# Altium PCB PCB_2021-02-27.pcbdoc (part 2 of 2)
Units mil, origin at the board's own origin, x right, y up, seen from the top; angles counter-clockwise.
Board outline 2908.11 x 4260.21 mil, 2 copper layers (Top Layer, Bottom Layer); 56 components, 104 nets, 335 pads, 150 vias.
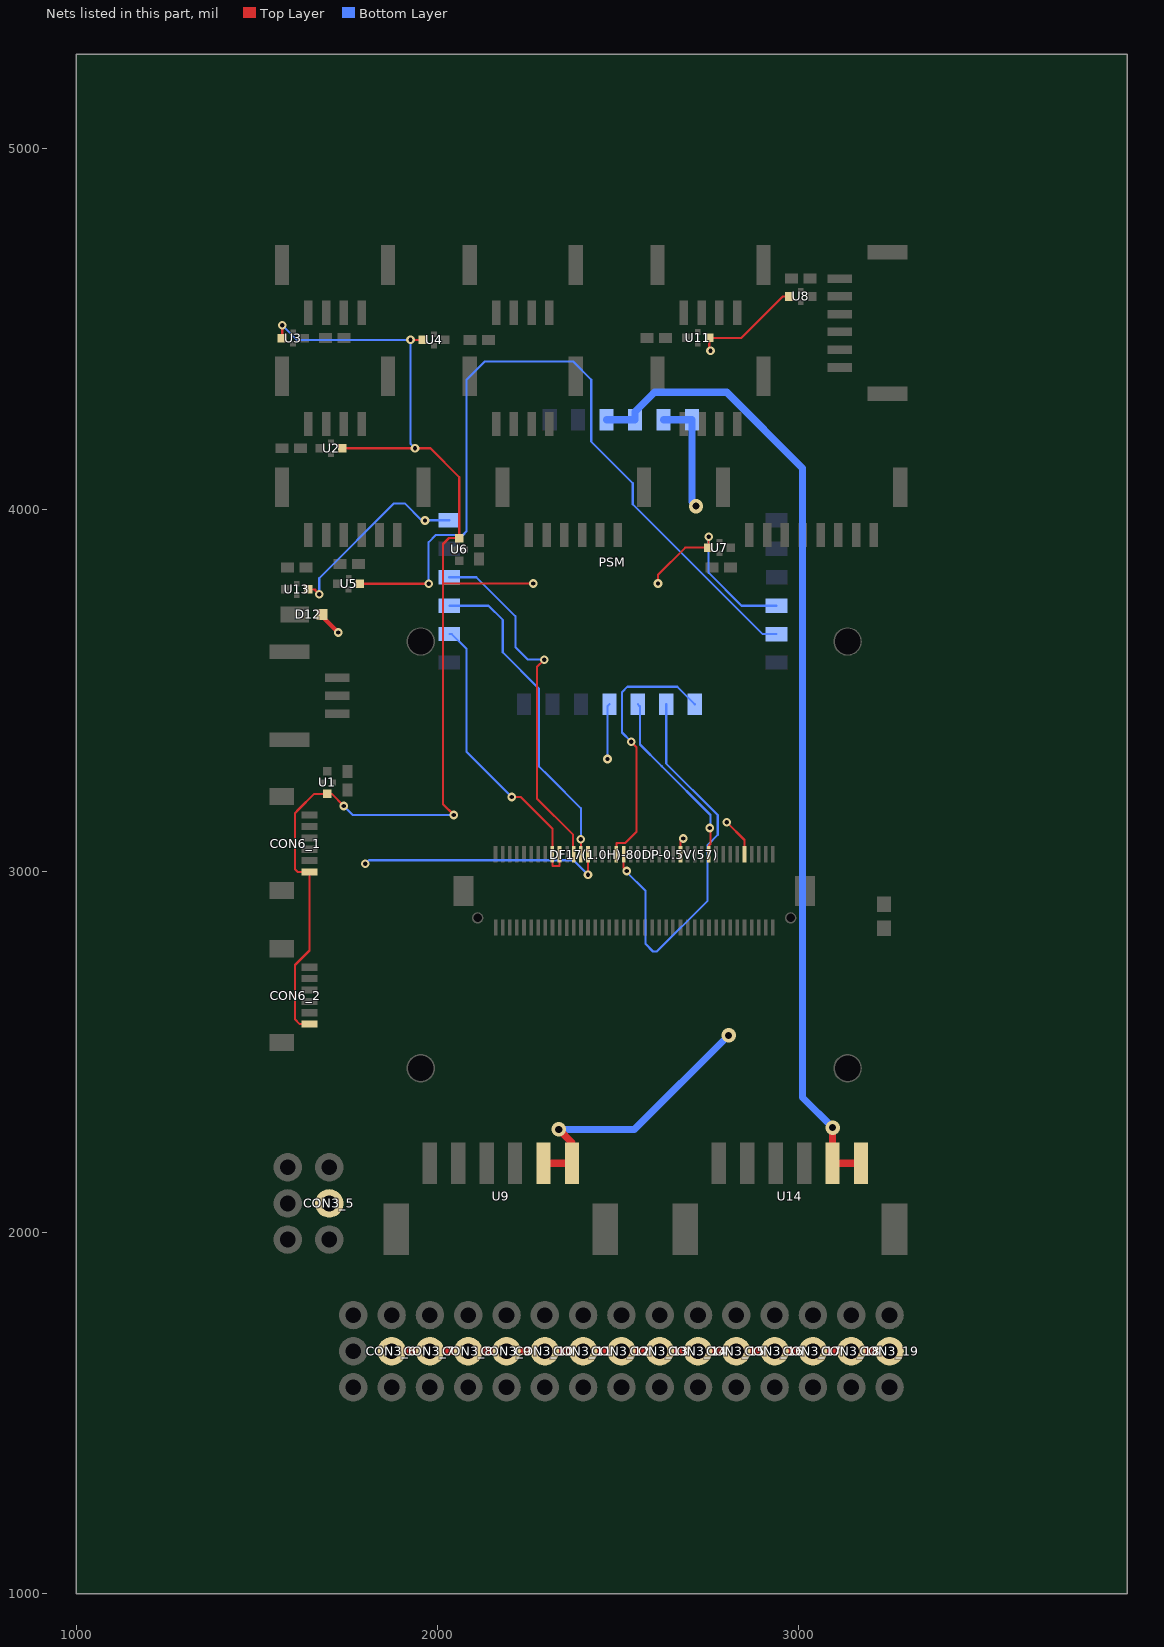
[diagram p2: the nets of this part, all layers, seen from the top]

## Via types
v1: diameter 24, hole 12, Top Layer to Bottom Layer, 144 vias
v2: diameter 40, hole 20, Top Layer to Bottom Layer, 6 vias

## Nets (pads, with @x,y where several pads share a name; then routed paths per layer and width w, separated by ;. In a path a pad name is that pad's centre, name@x,y a point inside that pad or via, vN(x,y) a via of type N, cw(c..) or ccw(c..) an arc to the next point about the centre after c; other vN are vias at no path point) (continued)
VDD_3V3_SPEKTRUM_EN: DF17(1.0H)-80DP-0.5V(57).19 PSM.9 | length 500.5
  Top Layer w6: 2750.65,3045.99 2750.65,3070.65 2755,3075 v1@2755,3120
  Bottom Layer w6: PSM.9@2554.06,3461.46 2560,3455.53 2560,3420 2560,3350 2620,3290 2755,3155 v1@2755,3120
  other v1: 2753,3119
VDD_5V_BACKUP: PSM.22 PSM.23 U14.1 U14.2 | length 2743.9
  Top Layer w6: U14.2@3093.1,2158.4 U14.2@3093.11,2191.53
  Top Layer w20: v2(3093.11,2290) U14.2@3093.11,2191.53 U14.1@3171.85,2191.53
  Bottom Layer w20: PSM.22@2467.44,4248.76 2546.09,4248.76 PSM.23@2546.18,4248.86 2546.19,4271.19 2600,4325 2800,4325 3010,4115 3010,2373.1 v2(3093.11,2290)
VDD_5V_BRICK: PSM.24 PSM.25 U9.1 U9.2 | length 2631.1
  Top Layer w20: U9.2@2293.11,2191.53 U9.1@2371.85,2191.53 2371.85,2248.15 v2(2335,2285)
  Mid-Layer 2 w20: v2(2715,4010) 2715,3910 2765,3860 2765,3330 2855,3240 2855,3020 2805,2970 v2(2805,2545)
  Bottom Layer w20: v2(2335,2285) 2545,2285 v2(2805,2545) ; PSM.24@2624.92,4248.86 2703.57,4248.86 PSM.25@2703.66,4248.76 2703.67,4021.33 v2(2715,4010)
VDD_5V_HIPOWER: PSM.5 U5.1 | length 2168.3
  Top Layer w6: U5.1@1785,3795 v1(1975,3795)
  Bottom Layer w6: v1(1975,3795) 1975,3910 1995,3930 2070,3930 2080,3940 2080,4360 2130,4410 2375,4410 2425,4360 2425,4188.4 2540,4073.4 2540,4015 2899.4,3655.5 PSM.5@2937.9,3655.5
VDD_5V_HIPOWER_OC: DF17(1.0H)-80DP-0.5V(57).45 PSM.7 | length 730.9
  Top Layer w6: 2494.8,3046 2494.8,3077.8 2519.9,3077.8 2550,3107.9 2550,3343.3 v1(2536,3357.3)
  Bottom Layer w6: v1(2536,3357.3) 2510,3383.3 2510,3495 2525,3510 2663,3510 PSM.7@2711.52,3461.46
VDD_5V_IN_PROT: DF17(1.0H)-80DP-0.5V(57).61 DF17(1.0H)-80DP-0.5V(57).63 PSM.15 | length 829.6
  Top Layer w6: v1(2205,3205) 2230,3205 2317.6,3117.4 2317.6,3046 2317.6,3014.3 2337.3,3014.3 2337.3,3046
  Bottom Layer w6: PSM.15@2032.4,3655.56 2039.44,3655.56 2080,3615 2080,3330 v1(2205,3205)
VDD_5V_PERIPH: CON6_1.1 CON6_2.1 PSM.4 U1.1 U2.1 U3.1 U4.1 U6.1 U7.1 U8.1 U11.1 | length 5209.2
  Top Layer w6: U3.1@1568.51,4475 1570,4476.49 v1(1570,4510) ; CON6_2.1@1645.24,2576.26 1618.74,2576.26 1605,2590 1605,2740 1645.24,2780.24 CON6_1.1@1645.24,2997.16 1612.84,2997.16 1610,3000 1605,3005 1605,3140 1605,3160 1615,3170 1658.5,3213.5 U1.1@1695,3213.51 1706.5,3213.5 v1(1740,3180) ; U2.1@1736.49,4170 1980,4170 2060,4090 U6.1@2060,3921.49 2031.49,3921.49 2015,3905 2015,3185 v1(2045,3155) ; v1(1925,4470) U4.1@1958.51,4470 ; 2015,3795.5 v1(2265,3795.5) ; v1(2610,3795.5) 2610,3820 2685,3895 U7.1@2748.51,3895 2750,3896.49 v1(2750,3925) ; v1(2755,4440) 2751.6,4443.4 U11.1@2751.59,4475.74 2752.34,4475 2840,4475 2955,4590 U8.1@2973.51,4590
  Mid-Layer 2 w6: v1(2265,3795.5) v1(2610,3795.5) ; v1(2750,3925) 2750,4435 v1(2755,4440)
  Bottom Layer w6: v1(1570,4510) 1610,4470 v1(1925,4470) 1925,4182.48 v1(1937.48,4170) ; v1(1740,3180) 1765,3155 v1(2045,3155) ; v1(2750,3925) 2750,3825 2840.71,3734.29 PSM.4@2937.92,3734.29
VDD_5V_PERIPH_EN: DF17(1.0H)-80DP-0.5V(57).27 PSM.10 | length 508
  Top Layer w6: 2671.95,3046.07 2671.95,3081.95 v1(2680,3090)
  Mid-Layer 2 w6: v1(2470,3310) 2680,3100 v1(2680,3090)
  Bottom Layer w6: v1(2470,3310) 2470,3456.23 PSM.10@2475.33,3461.56
VDD_5V_PERIPH_OC: DF17(1.0H)-80DP-0.5V(57).43 PSM.8 | length 1125.7
  Top Layer w6: 2514.5,3046 2514.5,3008.6 v1(2523.1,3000)
  Bottom Layer w6: v1(2523.1,3000) 2523.1,2996.9 2575,2945 2575,2798.5 2596.1,2777.4 2606.7,2777.4 2747.1,2917.8 2747.1,3072.1 2775,3100 2775,3155 2632.8,3297.2 PSM.8@2632.8,3461.46
VDD_BACKUP_VALID: DF17(1.0H)-80DP-0.5V(57).57 PSM.17 | length 996.4
  Top Layer w6: v1(2295,3585) 2275,3565 2275,3200 2375,3100 2375,3047.7 2376.8,3046
  Bottom Layer w6: PSM.17@2032.3,3813.04 2106.96,3813.04 2215,3705 2215,3620 2250,3585 v1(2295,3585)
VDD_BRICK_VALID: DF17(1.0H)-80DP-0.5V(57).55 PSM.16 | length 902.5
  Top Layer w6: 2396.3,3046 v1(2396.3,3087.6)
  Bottom Layer w6: PSM.16@2032.4,3734.3 2140.7,3734.3 2180,3695 2180,3605 2280,3505 2280,3290 2310,3260 2396.3,3173.7 v1(2396.3,3087.6)
VDD_SERVO: CON3_5.2 CON3_6.2 CON3_7.2 CON3_8.2 CON3_9.2 CON3_10.2 CON3_11.2 CON3_12.2 CON3_13.2 CON3_14.2 CON3_15.2 CON3_16.2 CON3_17.2 CON3_18.2 CON3_19.2 D12.2 DF17(1.0H)-80DP-0.5V(57).53 | length 4541.8
  Top Layer w6: v1(2416.1,2990) 2416.1,3046.03
  Top Layer w12: D12.2@1680,3710 1680,3705 v1(1725,3660)
  Top Layer w20: CON3_6.2@1872.61,1671.03 CON3_7.2@1978.61,1671.03 CON3_8.2@2084.61,1671.03 CON3_9.2@2190.61,1671.03 CON3_10.2@2296.61,1671.03 CON3_11.2@2402.61,1671.03 CON3_12.2@2508.61,1671.03 CON3_13.2@2614.61,1671.03 CON3_14.2@2720.61,1671.03 CON3_15.2@2826.61,1671.03 CON3_16.2@2932.61,1671.03 CON3_17.2@3038.61,1671.03 CON3_18.2@3144.61,1671.03 CON3_19.2@3250.61,1671.03
  Mid-Layer 2 w12: CON3_5.2@1700,2080 1800,2180 1800,3370 1725,3445 v1(1725,3660) ; 1820,1815 1820,1723.64 CON3_6.2@1872.61,1671.03 ; 1820,1831.81 1893.19,1831.81 1925,1800 1925,1724.64 CON3_7.2@1978.61,1671.03
  Mid-Layer 2 w20: CON3_5.2@1700,2080 1820,1960 1820,1815
  Bottom Layer w6: v1(1800,3020) 1810,3030 2376.1,3030 v1(2416.1,2990)
VDD_SERVO_IN: DF17(1.0H)-80DP-0.5V(57).9 PSM.19 U13.2 | length 2023
  Top Layer w6: U13.2@1641.5,3779.26 1662.4,3779.3 1662.4,3775.5 v1(1672,3765.9) ; v1(2800,3135) 2849.11,3085.89 2849.11,3046.03
  Mid-Layer 2 w6: v1(1965,3970) 2040,3895 2040,3580 2100,3520 2330,3520 2685,3165 2770,3165 v1(2800,3135)
  Bottom Layer w6: v1(1672,3765.9) 1672.1,3765.9 1672.1,3810.2 1879.4,4017.5 1908.5,4017.5 1955.49,3970.51 PSM.19@2032.4,3970.51
pads on no net: DF17(1.0H)-80DP-0.5V(57).81 DF17(1.0H)-80DP-0.5V(57).82 DF17(1.0H)-80DP-0.5V(57).83 DF17(1.0H)-80DP-0.5V(57).xx

## Polygon pours and split planes (outlines as drawn)
GND on Mid-Layer 2 (solid): 1505,1505 1505,4755 3335,4755 3335,1505 3340,1505 3335,1505 1505,1505
GND on Top Layer (solid): 1505,4755 3335,4755 3335,1505 1505,1505
GND on Bottom Layer (solid): 3335,4755 3335,1505 1505,1505 1505,4755
GND on Internal Plane 1 (split plane): 1505,1505 1505,4755 3335,4755 3335,1505
GND on Internal Plane 1 (split plane): 20 vertices, not listed, extent 3209.63,1530.05 3230.93,1551.35
GND on Internal Plane 1 (split plane): 20 vertices, not listed, extent 3103.63,1530.05 3124.93,1551.35
GND on Internal Plane 1 (split plane): 20 vertices, not listed, extent 2997.63,1530.05 3018.93,1551.35
GND on Internal Plane 1 (split plane): 20 vertices, not listed, extent 2891.63,1530.05 2912.93,1551.35
GND on Internal Plane 1 (split plane): 20 vertices, not listed, extent 2785.63,1530.05 2806.93,1551.35
GND on Internal Plane 1 (split plane): 20 vertices, not listed, extent 2679.63,1530.05 2700.93,1551.35
GND on Internal Plane 1 (split plane): 20 vertices, not listed, extent 1725.63,1530.05 1746.92,1551.35
GND on Internal Plane 1 (split plane): 20 vertices, not listed, extent 2573.63,1530.05 2594.93,1551.35
GND on Internal Plane 1 (split plane): 20 vertices, not listed, extent 2467.63,1530.05 2488.93,1551.35
GND on Internal Plane 1 (split plane): 20 vertices, not listed, extent 2361.63,1530.05 2382.93,1551.35
GND on Internal Plane 1 (split plane): 20 vertices, not listed, extent 2255.63,1530.05 2276.93,1551.35
GND on Internal Plane 1 (split plane): 20 vertices, not listed, extent 2149.63,1530.05 2170.93,1551.35
GND on Internal Plane 1 (split plane): 20 vertices, not listed, extent 2043.63,1530.05 2064.93,1551.35
GND on Internal Plane 1 (split plane): 20 vertices, not listed, extent 1937.63,1530.05 1958.92,1551.35
GND on Internal Plane 1 (split plane): 20 vertices, not listed, extent 1831.63,1530.05 1852.92,1551.35
GND on Internal Plane 1 (split plane): 20 vertices, not listed, extent 3270.3,1530.05 3291.59,1551.35
GND on Internal Plane 1 (split plane): 20 vertices, not listed, extent 3164.3,1530.05 3185.59,1551.35
GND on Internal Plane 1 (split plane): 20 vertices, not listed, extent 3058.3,1530.05 3079.59,1551.35
GND on Internal Plane 1 (split plane): 20 vertices, not listed, extent 2952.3,1530.05 2973.59,1551.35
GND on Internal Plane 1 (split plane): 20 vertices, not listed, extent 2846.3,1530.05 2867.59,1551.35
GND on Internal Plane 1 (split plane): 20 vertices, not listed, extent 2740.3,1530.05 2761.59,1551.35
GND on Internal Plane 1 (split plane): 20 vertices, not listed, extent 1786.3,1530.05 1807.59,1551.35
GND on Internal Plane 1 (split plane): 20 vertices, not listed, extent 2634.3,1530.05 2655.59,1551.35
GND on Internal Plane 1 (split plane): 20 vertices, not listed, extent 2528.3,1530.05 2549.59,1551.35
GND on Internal Plane 1 (split plane): 20 vertices, not listed, extent 2422.3,1530.05 2443.59,1551.35
GND on Internal Plane 1 (split plane): 20 vertices, not listed, extent 2316.3,1530.05 2337.59,1551.35
GND on Internal Plane 1 (split plane): 20 vertices, not listed, extent 2210.3,1530.05 2231.59,1551.35
GND on Internal Plane 1 (split plane): 20 vertices, not listed, extent 2104.3,1530.05 2125.59,1551.35
GND on Internal Plane 1 (split plane): 20 vertices, not listed, extent 1998.3,1530.05 2019.59,1551.35
GND on Internal Plane 1 (split plane): 20 vertices, not listed, extent 1892.3,1530.05 1913.59,1551.35
GND on Internal Plane 1 (split plane): 20 vertices, not listed, extent 3270.3,1590.71 3291.59,1612.01
GND on Internal Plane 1 (split plane): 20 vertices, not listed, extent 3209.63,1590.71 3230.93,1612.01
GND on Internal Plane 1 (split plane): 20 vertices, not listed, extent 3164.3,1590.71 3185.59,1612.01
GND on Internal Plane 1 (split plane): 20 vertices, not listed, extent 3103.63,1590.71 3124.93,1612.01
GND on Internal Plane 1 (split plane): 20 vertices, not listed, extent 3058.3,1590.71 3079.59,1612.01
GND on Internal Plane 1 (split plane): 20 vertices, not listed, extent 2997.63,1590.71 3018.93,1612.01
GND on Internal Plane 1 (split plane): 20 vertices, not listed, extent 2952.3,1590.71 2973.59,1612.01
GND on Internal Plane 1 (split plane): 20 vertices, not listed, extent 2891.63,1590.71 2912.93,1612.01
GND on Internal Plane 1 (split plane): 20 vertices, not listed, extent 2846.3,1590.71 2867.59,1612.01
GND on Internal Plane 1 (split plane): 20 vertices, not listed, extent 2785.63,1590.71 2806.93,1612.01
GND on Internal Plane 1 (split plane): 20 vertices, not listed, extent 2740.3,1590.71 2761.59,1612.01
GND on Internal Plane 1 (split plane): 20 vertices, not listed, extent 2679.63,1590.71 2700.93,1612.01
GND on Internal Plane 1 (split plane): 20 vertices, not listed, extent 1786.3,1590.71 1807.59,1612.01
GND on Internal Plane 1 (split plane): 20 vertices, not listed, extent 1725.63,1590.71 1746.92,1612.01
GND on Internal Plane 1 (split plane): 20 vertices, not listed, extent 2634.3,1590.71 2655.59,1612.01
GND on Internal Plane 1 (split plane): 20 vertices, not listed, extent 2573.63,1590.71 2594.93,1612.01
GND on Internal Plane 1 (split plane): 20 vertices, not listed, extent 2528.3,1590.71 2549.59,1612.01
GND on Internal Plane 1 (split plane): 20 vertices, not listed, extent 2467.63,1590.71 2488.93,1612.01
GND on Internal Plane 1 (split plane): 20 vertices, not listed, extent 2422.3,1590.71 2443.59,1612.01
GND on Internal Plane 1 (split plane): 20 vertices, not listed, extent 2361.63,1590.71 2382.93,1612.01
GND on Internal Plane 1 (split plane): 20 vertices, not listed, extent 2316.3,1590.71 2337.59,1612.01
GND on Internal Plane 1 (split plane): 20 vertices, not listed, extent 2255.63,1590.71 2276.93,1612.01
GND on Internal Plane 1 (split plane): 20 vertices, not listed, extent 2210.3,1590.71 2231.59,1612.01
GND on Internal Plane 1 (split plane): 20 vertices, not listed, extent 2149.63,1590.71 2170.93,1612.01
GND on Internal Plane 1 (split plane): 20 vertices, not listed, extent 2104.3,1590.71 2125.59,1612.01
GND on Internal Plane 1 (split plane): 20 vertices, not listed, extent 2043.63,1590.71 2064.93,1612.01
GND on Internal Plane 1 (split plane): 20 vertices, not listed, extent 1998.3,1590.71 2019.59,1612.01
GND on Internal Plane 1 (split plane): 20 vertices, not listed, extent 1937.63,1590.71 1958.92,1612.01
GND on Internal Plane 1 (split plane): 20 vertices, not listed, extent 1892.3,1590.71 1913.59,1612.01
GND on Internal Plane 1 (split plane): 20 vertices, not listed, extent 1831.63,1590.71 1852.92,1612.01
GND on Internal Plane 1 (split plane): 150 vertices, not listed, extent 3205.15,1625.56 3296.08,1716.5
GND on Internal Plane 1 (split plane): 150 vertices, not listed, extent 3099.15,1625.56 3190.08,1716.5
GND on Internal Plane 1 (split plane): 150 vertices, not listed, extent 2993.15,1625.56 3084.08,1716.5
GND on Internal Plane 1 (split plane): 150 vertices, not listed, extent 2887.15,1625.56 2978.08,1716.5
GND on Internal Plane 1 (split plane): 150 vertices, not listed, extent 2781.15,1625.56 2872.08,1716.5
GND on Internal Plane 1 (split plane): 150 vertices, not listed, extent 2675.15,1625.56 2766.08,1716.5
GND on Internal Plane 1 (split plane): 150 vertices, not listed, extent 1721.15,1625.56 1812.08,1716.5
GND on Internal Plane 1 (split plane): 150 vertices, not listed, extent 2569.15,1625.56 2660.08,1716.5
GND on Internal Plane 1 (split plane): 150 vertices, not listed, extent 2463.15,1625.56 2554.08,1716.5
GND on Internal Plane 1 (split plane): 150 vertices, not listed, extent 2357.15,1625.56 2448.08,1716.5
GND on Internal Plane 1 (split plane): 150 vertices, not listed, extent 2251.15,1625.56 2342.08,1716.5
GND on Internal Plane 1 (split plane): 150 vertices, not listed, extent 2145.15,1625.56 2236.08,1716.5
GND on Internal Plane 1 (split plane): 150 vertices, not listed, extent 2039.15,1625.56 2130.08,1716.5
GND on Internal Plane 1 (split plane): 150 vertices, not listed, extent 1933.15,1625.56 2024.08,1716.5
GND on Internal Plane 1 (split plane): 150 vertices, not listed, extent 1827.15,1625.56 1918.08,1716.5
GND on Internal Plane 1 (split plane): 150 vertices, not listed, extent 3205.15,1725.56 3296.08,1816.5
GND on Internal Plane 1 (split plane): 150 vertices, not listed, extent 3099.15,1725.56 3190.08,1816.5
GND on Internal Plane 1 (split plane): 150 vertices, not listed, extent 2993.15,1725.56 3084.08,1816.5
GND on Internal Plane 1 (split plane): 150 vertices, not listed, extent 2887.15,1725.56 2978.08,1816.5
GND on Internal Plane 1 (split plane): 150 vertices, not listed, extent 2781.15,1725.56 2872.08,1816.5
GND on Internal Plane 1 (split plane): 150 vertices, not listed, extent 2675.15,1725.56 2766.08,1816.5
GND on Internal Plane 1 (split plane): 150 vertices, not listed, extent 1721.15,1725.56 1812.08,1816.5
GND on Internal Plane 1 (split plane): 150 vertices, not listed, extent 2569.15,1725.56 2660.08,1816.5
GND on Internal Plane 1 (split plane): 150 vertices, not listed, extent 2463.15,1725.56 2554.08,1816.5
GND on Internal Plane 1 (split plane): 150 vertices, not listed, extent 2357.15,1725.56 2448.08,1816.5
GND on Internal Plane 1 (split plane): 150 vertices, not listed, extent 2251.15,1725.56 2342.08,1816.5
GND on Internal Plane 1 (split plane): 150 vertices, not listed, extent 2145.15,1725.56 2236.08,1816.5
GND on Internal Plane 1 (split plane): 150 vertices, not listed, extent 2039.15,1725.56 2130.08,1816.5
GND on Internal Plane 1 (split plane): 150 vertices, not listed, extent 1933.15,1725.56 2024.08,1816.5
GND on Internal Plane 1 (split plane): 150 vertices, not listed, extent 1827.15,1725.56 1918.08,1816.5
GND on Internal Plane 1 (split plane): 95 vertices, not listed, extent 1751.9,1821.91 1788.1,1858.09
GND on Internal Plane 1 (split plane): 20 vertices, not listed, extent 1544.02,1939.02 1565.32,1960.32
GND on Internal Plane 1 (split plane): 20 vertices, not listed, extent 1659.02,1939.02 1680.32,1960.32
GND on Internal Plane 1 (split plane): 20 vertices, not listed, extent 1604.68,1939.02 1625.98,1960.32
GND on Internal Plane 1 (split plane): 20 vertices, not listed, extent 1719.68,1939.02 1740.98,1960.32
GND on Internal Plane 1 (split plane): 20 vertices, not listed, extent 1604.68,1999.68 1625.98,2020.98
GND on Internal Plane 1 (split plane): 20 vertices, not listed, extent 1544.02,1999.68 1565.32,2020.98
GND on Internal Plane 1 (split plane): 20 vertices, not listed, extent 1719.68,1999.68 1740.98,2020.98
GND on Internal Plane 1 (split plane): 20 vertices, not listed, extent 1659.02,1999.68 1680.32,2020.98
GND on Internal Plane 1 (split plane): 150 vertices, not listed, extent 1539.54,2034.53 1630.47,2125.47
GND on Internal Plane 1 (split plane): 150 vertices, not listed, extent 1654.54,2034.53 1745.47,2125.47
GND on Internal Plane 1 (split plane): 95 vertices, not listed, extent 2186.9,2081.91 2223.1,2118.09
GND on Internal Plane 1 (split plane): 95 vertices, not listed, extent 2117.53,2081.91 2153.73,2118.09
GND on Internal Plane 1 (split plane): 150 vertices, not listed, extent 1539.54,2134.53 1630.47,2225.47
GND on Internal Plane 1 (split plane): 150 vertices, not listed, extent 1654.54,2134.53 1745.47,2225.47
GND on Internal Plane 1 (split plane): 114 vertices, not listed, extent 2308.91,2258.9 2361.1,2311.1
GND on Internal Plane 1 (split plane): 114 vertices, not listed, extent 3067.02,2263.9 3119.21,2316.1
GND on Internal Plane 1 (split plane): 95 vertices, not listed, extent 2916.9,2276.91 2953.1,2313.09
GND on Internal Plane 1 (split plane): 95 vertices, not listed, extent 2991.9,2276.91 3028.1,2313.09
GND on Internal Plane 1 (split plane): 95 vertices, not listed, extent 2247.6,2286.91 2283.8,2323.09
GND on Internal Plane 1 (split plane): 95 vertices, not listed, extent 2306.9,2391.91 2343.1,2428.09
GND on Internal Plane 1 (split plane): 150 vertices, not listed, extent 1907.89,2408.59 1998.82,2499.53
GND on Internal Plane 1 (split plane): 150 vertices, not listed, extent 3088.99,2408.59 3179.92,2499.53
GND on Internal Plane 1 (split plane): 114 vertices, not listed, extent 2778.91,2518.9 2831.1,2571.1
GND on Internal Plane 1 (split plane): 95 vertices, not listed, extent 1706.9,2591.91 1743.1,2628.09
GND on Internal Plane 1 (split plane): 95 vertices, not listed, extent 3022.6,2594.41 3058.8,2630.59
GND on Internal Plane 1 (split plane): 175 vertices, not listed, extent 1736.9,2616.91 1773.1,2688.09
GND on Internal Plane 1 (split plane): 95 vertices, not listed, extent 2871.9,2616.91 2908.1,2653.09
GND on Internal Plane 1 (split plane): 95 vertices, not listed, extent 2672.3,2659.91 2708.5,2696.09
GND on Internal Plane 1 (split plane): 95 vertices, not listed, extent 2866.9,2661.91 2903.1,2698.09
GND on Internal Plane 1 (split plane): 95 vertices, not listed, extent 1667.1,2684.11 1703.3,2720.29
GND on Internal Plane 1 (split plane): 95 vertices, not listed, extent 3066.9,2726.91 3103.1,2763.09
GND on Internal Plane 1 (split plane): 95 vertices, not listed, extent 3026.9,2751.91 3063.1,2788.09
GND on Internal Plane 1 (split plane): 95 vertices, not listed, extent 2956.9,2776.91 2993.1,2813.09
GND on Internal Plane 1 (split plane): 95 vertices, not listed, extent 2583.2,2784.01 2619.4,2820.19
GND on Internal Plane 1 (split plane): 95 vertices, not listed, extent 2491.4,2784.61 2527.6,2820.79
GND on Internal Plane 1 (split plane): 95 vertices, not listed, extent 1851.1,2796.31 1887.3,2832.49
GND on Internal Plane 1 (split plane): 18 vertices, not listed, extent 2090.43,2849.83 2102.93,2862.33
GND on Internal Plane 1 (split plane): 18 vertices, not listed, extent 2956.63,2849.83 2969.13,2862.33
GND on Internal Plane 1 (split plane): 17 vertices, not listed, extent 2118.67,2849.83 2131.18,2862.33
GND on Internal Plane 1 (split plane): 17 vertices, not listed, extent 2984.87,2849.83 2997.38,2862.33
GND on Internal Plane 1 (split plane): 95 vertices, not listed, extent 2871.9,2876.91 2908.1,2913.09
GND on Internal Plane 1 (split plane): 95 vertices, not listed, extent 2481.9,2876.91 2518.1,2913.09
GND on Internal Plane 1 (split plane): 17 vertices, not listed, extent 2118.67,2878.07 2131.18,2890.57
GND on Internal Plane 1 (split plane): 18 vertices, not listed, extent 2090.43,2878.07 2102.93,2890.57
GND on Internal Plane 1 (split plane): 17 vertices, not listed, extent 2984.87,2878.07 2997.38,2890.57
GND on Internal Plane 1 (split plane): 18 vertices, not listed, extent 2956.63,2878.07 2969.13,2890.57
GND on Internal Plane 1 (split plane): 181 vertices, not listed, extent 2636.9,2886.71 2692.2,2953.09
GND on Internal Plane 1 (split plane): 95 vertices, not listed, extent 2456.9,2921.91 2493.1,2958.09
GND on Internal Plane 1 (split plane): 179 vertices, not listed, extent 2586.9,2926.91 2648.1,2988.09
GND on Internal Plane 1 (split plane): 95 vertices, not listed, extent 2815.2,2937.21 2851.4,2973.39
GND on Internal Plane 1 (split plane): 175 vertices, not listed, extent 2676.9,2956.91 2731.1,3023.09
GND on Internal Plane 1 (split plane): 95 vertices, not listed, extent 2561.9,2956.91 2598.1,2993.09
GND on Internal Plane 1 (split plane): 95 vertices, not listed, extent 2398,2971.91 2434.2,3008.09
GND on Internal Plane 1 (split plane): 95 vertices, not listed, extent 3141.9,2981.91 3178.1,3018.09
GND on Internal Plane 1 (split plane): 95 vertices, not listed, extent 2505,2981.91 2541.2,3018.09
GND on Internal Plane 1 (split plane): 95 vertices, not listed, extent 2890.1,2986.91 2926.3,3023.09
GND on Internal Plane 1 (split plane): 95 vertices, not listed, extent 1781.9,3001.91 1818.1,3038.09
GND on Internal Plane 1 (split plane): 299 vertices, not listed, extent 1671.9,3010.57 1708.1,3143.09
GND on Internal Plane 1 (split plane): 95 vertices, not listed, extent 2936.9,3046.91 2973.1,3083.09
GND on Internal Plane 1 (split plane): 255 vertices, not listed, extent 2378.2,3069.51 2463.1,3148.09
GND on Internal Plane 1 (split plane): 95 vertices, not listed, extent 2661.9,3071.91 2698.1,3108.09
GND on Internal Plane 1 (split plane): 95 vertices, not listed, extent 2709.9,3073.91 2746.1,3110.09
GND on Internal Plane 1 (split plane): 95 vertices, not listed, extent 2246.9,3076.91 2283.1,3113.09
GND on Internal Plane 1 (split plane): 155 vertices, not listed, extent 2476.9,3096.91 2543.1,3138.09
GND on Internal Plane 1 (split plane): 167 vertices, not listed, extent 2709.9,3100.91 2771.1,3159.09
GND on Internal Plane 1 (split plane): 95 vertices, not listed, extent 2216.9,3101.91 2253.1,3138.09
GND on Internal Plane 1 (split plane): 95 vertices, not listed, extent 2781.9,3116.91 2818.1,3153.09
GND on Internal Plane 1 (split plane): 95 vertices, not listed, extent 2026.9,3136.91 2063.1,3173.09
GND on Internal Plane 1 (split plane): 95 vertices, not listed, extent 2506.9,3146.91 2543.1,3183.09
GND on Internal Plane 1 (split plane): 95 vertices, not listed, extent 1721.9,3161.91 1758.1,3198.09
GND on Internal Plane 1 (split plane): 169 vertices, not listed, extent 3053.2,3171.91 3123.1,3209.99
GND on Internal Plane 1 (split plane): 95 vertices, not listed, extent 2186.9,3186.91 2223.1,3223.09
GND on Internal Plane 1 (split plane): 95 vertices, not listed, extent 2506.9,3191.91 2543.1,3228.09
GND on Internal Plane 1 (split plane): 95 vertices, not listed, extent 2451.9,3291.91 2488.1,3328.09
GND on Internal Plane 1 (split plane): 95 vertices, not listed, extent 2517.9,3339.21 2554.1,3375.39
GND on Internal Plane 1 (split plane): 95 vertices, not listed, extent 2516.9,3381.91 2553.1,3418.09
GND on Internal Plane 1 (split plane): 95 vertices, not listed, extent 3126.9,3441.91 3163.1,3478.09
GND on Internal Plane 1 (split plane): 95 vertices, not listed, extent 1757.5,3475.41 1793.7,3511.59
GND on Internal Plane 1 (split plane): 95 vertices, not listed, extent 2276.9,3566.91 2313.1,3603.09
GND on Internal Plane 1 (split plane): 150 vertices, not listed, extent 1907.89,3589.69 1998.82,3680.63
GND on Internal Plane 1 (split plane): 150 vertices, not listed, extent 3088.99,3589.69 3179.92,3680.63
GND on Internal Plane 1 (split plane): 95 vertices, not listed, extent 2241.9,3596.91 2278.1,3633.09
GND on Internal Plane 1 (split plane): 95 vertices, not listed, extent 1706.9,3641.91 1743.1,3678.09
GND on Internal Plane 1 (split plane): 177 vertices, not listed, extent 2231.9,3706.91 2303.1,3743.09
GND on Internal Plane 1 (split plane): 95 vertices, not listed, extent 1653.9,3747.81 1690.1,3783.99
GND on Internal Plane 1 (split plane): 95 vertices, not listed, extent 1956.9,3776.91 1993.1,3813.09
GND on Internal Plane 1 (split plane): 95 vertices, not listed, extent 2246.9,3777.41 2283.1,3813.59
GND on Internal Plane 1 (split plane): 95 vertices, not listed, extent 2591.9,3777.41 2628.1,3813.59
GND on Internal Plane 1 (split plane): 95 vertices, not listed, extent 2861.9,3836.91 2898.1,3873.09
GND on Internal Plane 1 (split plane): 95 vertices, not listed, extent 3090.76,3851.91 3126.96,3888.09
GND on Internal Plane 1 (split plane): 95 vertices, not listed, extent 1843.7,3854.81 1879.9,3890.99
GND on Internal Plane 1 (split plane): 95 vertices, not listed, extent 2731.9,3906.91 2768.1,3943.09
GND on Internal Plane 1 (split plane): 95 vertices, not listed, extent 1946.9,3951.91 1983.1,3988.09
GND on Internal Plane 1 (split plane): 95 vertices, not listed, extent 1771.7,3963.51 1807.9,3999.69
GND on Internal Plane 1 (split plane): 95 vertices, not listed, extent 3053.2,3964.51 3089.4,4000.69
GND on Internal Plane 1 (split plane): 114 vertices, not listed, extent 2688.91,3983.9 2741.1,4036.1
GND on Internal Plane 1 (split plane): 95 vertices, not listed, extent 2345.9,3999.21 2382.1,4035.39
GND on Internal Plane 1 (split plane): 95 vertices, not listed, extent 1828.8,4008.81 1865,4044.99
GND on Internal Plane 1 (split plane): 95 vertices, not listed, extent 1641.9,4106.91 1678.1,4143.09
GND on Internal Plane 1 (split plane): 95 vertices, not listed, extent 1919.38,4151.91 1955.58,4188.09
GND on Internal Plane 1 (split plane): 95 vertices, not listed, extent 2616.9,4171.91 2653.1,4208.09
GND on Internal Plane 1 (split plane): 95 vertices, not listed, extent 2346.2,4177.21 2382.4,4213.39
GND on Internal Plane 1 (split plane): 95 vertices, not listed, extent 1836.9,4196.91 1873.1,4233.09
GND on Internal Plane 1 (split plane): 95 vertices, not listed, extent 2091.9,4241.91 2128.1,4278.09
GND on Internal Plane 1 (split plane): 177 vertices, not listed, extent 2121.9,4336.91 2193.1,4373.09
GND on Internal Plane 1 (split plane): 95 vertices, not listed, extent 2736.9,4421.91 2773.1,4458.09
GND on Internal Plane 1 (split plane): 255 vertices, not listed, extent 3006.9,4424.55 3067.9,4509.95
GND on Internal Plane 1 (split plane): 95 vertices, not listed, extent 1906.9,4451.91 1943.1,4488.09
GND on Internal Plane 1 (split plane): 95 vertices, not listed, extent 1551.9,4491.91 1588.1,4528.09
GND on Internal Plane 1 (split plane): 183 vertices, not listed, extent 2737,4573.91 2808.1,4618.09
GND on Internal Plane 1 (split plane): 95 vertices, not listed, extent 1721,4579.01 1757.2,4615.19
GND on Internal Plane 1 (split plane): 95 vertices, not listed, extent 3171.1,4581.71 3207.3,4617.89
GND on Internal Plane 1 (split plane): 95 vertices, not listed, extent 1671.9,4581.91 1708.1,4618.09

## Text inside footprints (layer, text, board x,y; h text height)
CON3_4: Top Overlay "S" at 1836.61,1797.86 h59.05 r180; Top Overlay "5v" at 1833.01,1641.72 h59.05 r353; Top Overlay "G" at 1836.61,1600.56 h59.05 r180
CON3_5: Top Overlay "S" at 1770,2206.83 h59.05 r180; Top Overlay "5v" at 1766.4,2050.69 h59.05 r353; Top Overlay "G" at 1770,2009.53 h59.05 r180
CON3_6: Top Overlay "S" at 1942.61,1797.86 h59.05 r180; Top Overlay "5v" at 1939.01,1641.72 h59.05 r353; Top Overlay "G" at 1942.61,1600.56 h59.05 r180
CON3_7: Top Overlay "S" at 2048.61,1797.86 h59.05 r180; Top Overlay "5v" at 2045.01,1641.72 h59.05 r353; Top Overlay "G" at 2048.61,1600.56 h59.05 r180
CON3_8: Top Overlay "S" at 2154.61,1797.86 h59.05 r180; Top Overlay "5v" at 2151.01,1641.72 h59.05 r353; Top Overlay "G" at 2154.61,1600.56 h59.05 r180
CON3_9: Top Overlay "S" at 2260.61,1797.86 h59.05 r180; Top Overlay "5v" at 2257.01,1641.72 h59.05 r353; Top Overlay "G" at 2260.61,1600.56 h59.05 r180
CON3_10: Top Overlay "S" at 2366.61,1797.86 h59.05 r180; Top Overlay "5v" at 2363.01,1641.72 h59.05 r353; Top Overlay "G" at 2366.61,1600.56 h59.05 r180
CON3_11: Top Overlay "S" at 2472.61,1797.86 h59.05 r180; Top Overlay "5v" at 2469.01,1641.72 h59.05 r353; Top Overlay "G" at 2472.61,1600.56 h59.05 r180
CON3_12: Top Overlay "S" at 2578.61,1797.86 h59.05 r180; Top Overlay "5v" at 2575.01,1641.72 h59.05 r353; Top Overlay "G" at 2578.61,1600.56 h59.05 r180
CON3_13: Top Overlay "S" at 2684.61,1797.86 h59.05 r180; Top Overlay "5v" at 2681.01,1641.72 h59.05 r353; Top Overlay "G" at 2684.61,1600.56 h59.05 r180
DF17(1.0H)-80DP-0.5V(57): Top Overlay "PIXHAWK CUBE" at 1976.67,2635.8 h78.74 r90